# Altium PCB DogBLDC.PcbDoc
Units mm, origin at the board's own origin, x right, y up, seen from the top; angles counter-clockwise.
Board outline 40 x 50 mm, 4 copper layers (Top Layer, Signal Layer 5, Signal Layer 8, Bottom Layer), stack 1.49 mm thick; 102 components, 90 nets, 395 pads, 72 vias.
Unrouted connection lines stored in the file: 234.
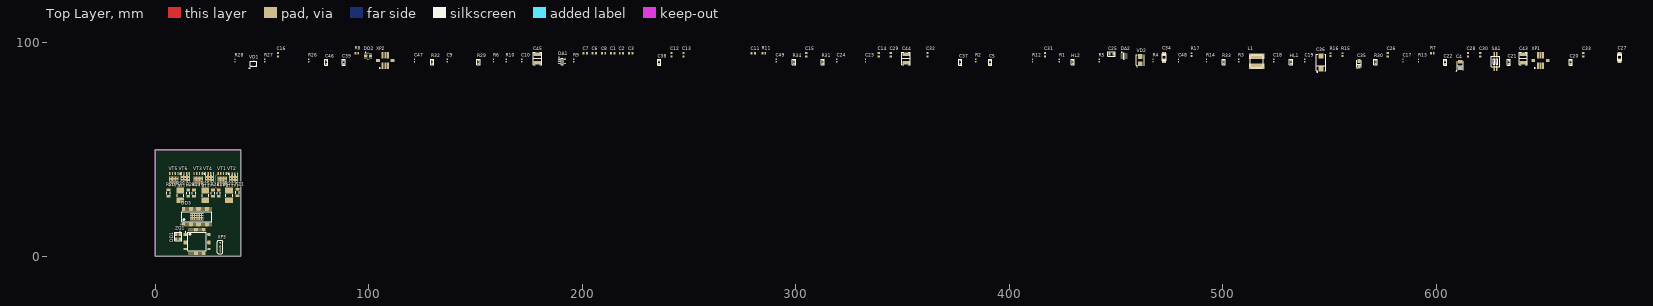
[diagram p0: Top Layer view]
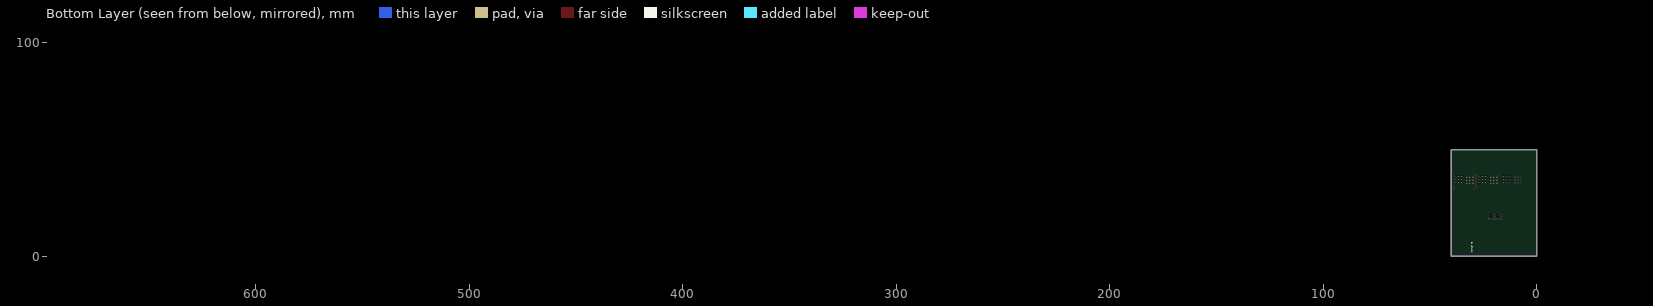
[diagram p1: Bottom Layer view, seen from below]
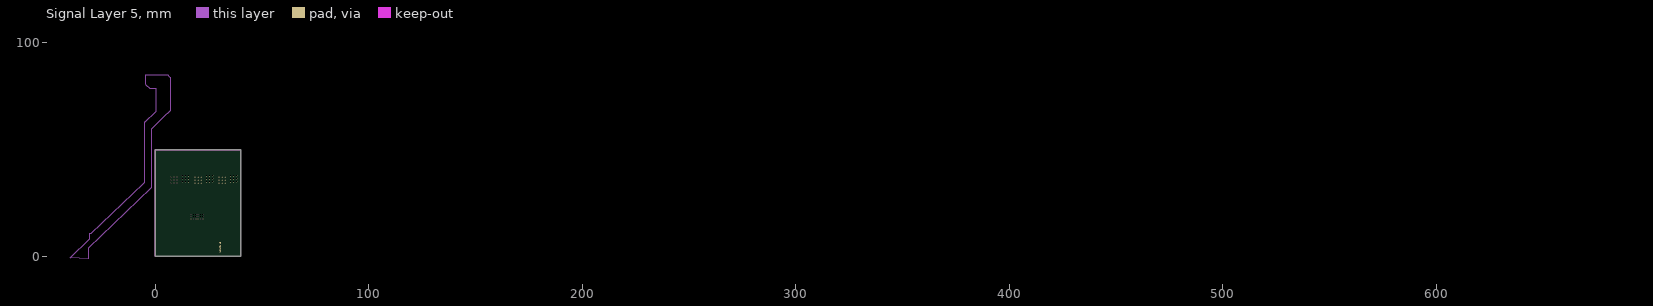
[diagram p2: Signal Layer 5]

## Layer stack, top to bottom
Top Solder: solder mask 0.0102, Solder Resist, Dk 3.5
Top Layer: signal copper 0.035
Dielectric 2: prepreg 0.32, Dk 4.2
Signal Layer 5: signal copper 0.035
Dielectric 4: core 0.71, Dk 4.2
Signal Layer 8: signal copper 0.035
Dielectric 9: prepreg 0.32, Dk 4.2
Bottom Layer: signal copper 0.035
Bottom Solder: solder mask 0.1016, Solder Resist, Dk 3.5

## Board outline
0,0 40,0 40,50 0,50

## Design rules (kind name [scope] priority, off if disabled: settings)
Clearance DIGITAL_SIGNAL [All] p1: gap=0.2
ComponentClearance [All] p1 off: gap=0.254 collisioncheckmode=3 verticalgap=0.254 showdistances=FALSE
DiffPairsRouting DiffPair_DiffPairsRouting [InDifferentialPair ('NewDifferentialPair1')] p1 off: maxlimit=0.254 minlimit=0.254 mostfreqgap=0.254 toplayer_minwidth=0.381 toplayer_maxwidth=0.381 toplayer_prefwidth=0.381 midlayer1_minwidth=0.381 midlayer1_maxwidth=0.381 midlayer1_prefwidth=0.381 midlayer2_minwidth=0.381 midlayer2_maxwidth=0.381 midlayer2_prefwidth=0.381 bottomlayer_minwidth=0.381 bottomlayer_maxwidth=0.381 bottomlayer_prefwidth=0.381 maxuncoupledlength=12.7
DiffPairsRouting [All] p2: maxlimit=0.254 minlimit=0.2 mostfreqgap=0.2 toplayer_minwidth=0.2 toplayer_maxwidth=0.381 toplayer_prefwidth=0.2 midlayer1_minwidth=0.2 midlayer1_maxwidth=0.381 midlayer1_prefwidth=0.2 midlayer2_minwidth=0.2 midlayer2_maxwidth=0.381 midlayer2_prefwidth=0.2 bottomlayer_minwidth=0.2 bottomlayer_maxwidth=0.381 bottomlayer_prefwidth=0.2 maxuncoupledlength=12.7
Height [All] p1 off: minheight=0 maxheight=25.4 prefheight=12.7
MatchedLengths DiffPair_MatchedLengths [InNetClass('DIFF')] p1: tolerance=0.5 checknetsindiffpair=TRUE checkdiffpairvsdiffpair=FALSE checkothers=FALSE
PlaneClearance PlaneClearance_1 [InNetClass('Signal')] p1 off: clearance=35
PlaneClearance [InNetClass('POWER')] p2: clearance=0.7
PlaneConnect [All] p1: planeconnectstyle=Relief reliefexpansion=0.508 reliefentries=4 reliefconductorwidth=0.35 reliefairgap=0.254
PolygonConnect [All] p1: connectstyle=Relief reliefconductorwidth=0.3 reliefentries=4 polygonreliefangle="90 Angle" airgapwidth=0.22
RoutingVias [All] p1: holewidth=0.4 width=0.7 viastyle="Through Hole" minholewidth=0.4 minwidth=0.7 maxholewidth=0.711 maxwidth=1.27
SolderMaskExpansion [All] p1: expansion=0.102
Width Width_SignalPower [All] p1: maxlimit=2 minlimit=0.2 preferedwidth=0.22 checkconnectedcopper=TRUE
24 further rules are at their usual default settings.

## Classes and differential pairs
differential pair I_U_1: +"" -""
differential pair I_V_1: +"" -""
differential pair I_W_1: +I_W_1_P -I_W_1_N
differential pair I_U_2: +"" -""
differential pair CAN: +CAN_P -CAN_N
differential pair I_V_2: +"" -""

## Components (designator, comment, footprint, x,y, rotation, side; value= is the part's Value field where it differs from the comment)
C1 "Capacitor" 0603cap 214.299,95.149 r0 top
C2 "Capacitor" 0603cap 218.399,95.149 r0 top
C3 "Capacitor" 0603cap 222.799,95.149 r0 top
C4 "1uF" "TC_B (3528)" 611.298,89.65 r90 top
C5 "Capacitor" 0603c 391.199,90.85 r90 top
C6 "Capacitor" 0603cap 205.699,95.149 r0 top
C7 "Capacitor" 0603cap 201.399,95.149 r0 top
C8 "Capacitor" 0603cap 209.999,95.149 r0 top
C9 "C_1" "RES 0402" 136.799,91.749 r90 top
C10 "C_1" "RES 0402" 171.699,91.749 r90 top
C11 "Capacitor" 0603cap 280.099,95.149 r0 top
C12 "Capacitor" 0603cap 241.799,94.449 r90 top
C13 "Capacitor" 0603cap 247.399,94.449 r90 top
C14 "Capacitor" 0603cap 338.899,94.449 r90 top
C15 "Capacitor" 0603cap 304.899,94.449 r90 top
C16 "Capacitor" 0603cap 57.5,94.449 r90 top
C17 "C_1" "RES 0402" 584.498,91.749 r90 top
C18 "C_1" "RES 0402" 523.899,91.749 r90 top
C19 "C_1" "RES 0402" 538.499,91.749 r90 top
C20 "C_1" 0603c 663.098,90.85 r90 top
C21 "C_1" 0603c 634.098,90.85 r90 top
C22 "C_1" 0603c 604.198,90.85 r90 top
C23 "C_1" "RES 0402" 332.699,91.749 r90 top
C24 "C_1" "RES 0402" 319.299,91.749 r90 top
C25 "C_1" 0805 447.999,94.749 r0 top
C26 "C_1" 0603cap 577.299,94.449 r90 top
C27 "C_1" "1206 - duplicate" 685.898,91.649 r90 top
C28 "C_1" 0603cap 614.898,94.449 r90 top
C29 "C_1" 0603cap 344.499,94.449 r90 top
C30 "C_1" 0603cap 620.698,94.449 r90 top
C31 "C_1" 0603cap 416.799,94.449 r90 top
C32 "C_1" 0603cap 361.699,94.449 r90 top
C33 "C_1" 0603cap 668.898,94.449 r90 top
C34 "C_1" "1206 - duplicate" 472.499,91.649 r90 top
C35 "1uF" "TC_A (3216)" 563.899,90.25 r90 top
C36 "1uF" "TC_D (7343)" 546.099,90.85 r90 top
C37 "0.1 мк" 0603C 377.199,90.85 r90 top
C38 "0.1 мк" 0603C 235.999,90.85 r90 top
C39 "Capacitor" 0603C 88.199,90.85 r90 top
C43 "10 мк" 1812С 640.798,92.749 r90 top
C44 "10 мк" 1812С 351.699,92.749 r90 top
C45 "10 мк" 1812С 178.999,92.749 r90 top
C46 "0.1 мк" 0603C 80.199,90.85 r90 top
C47 "Capacitor" "RES 0402" 121.399,91.749 r90 top
C48 "Capacitor" "RES 0402" 479.299,91.749 r90 top
C49 "Capacitor" "RES 0402" 290.899,91.749 r90 top
DA1 "TLV2781" SOT23-5 190.599,91.349 r0 top
DA2 "TPS7B9xx" SOT23_6_Pin 453.799,93.849 r0 top
DD1 "STM32G431x6" STM-LQFP64_L 19.6,7 r0 top
DD2 "TCAN337DCN" SOT23-8 99.699,93.849 r0 top
DD3 "DRV8310" TSSOP50P810X120_HS-57N 19.5,18.6 r90 top
HL1 "Value" 0603D 531.999,91.05 r90 top
HL2 "Value" 0603D 429.799,91.05 r90 top
L1 "DR74-330-R" "Inductor 6.3x6.3" 515.999,91.449 r0 top
R1 "Resistor" "RES 0402" 423.499,91.749 r90 top
R2 "Resistor" "RES 0402" 384.299,91.749 r90 top
R3 "Resistor" "RES 0402" 507.499,91.749 r90 top
R4 "Resistor" "RES 0402" 467.399,91.749 r90 top
R5 "Resistor" "RES 0402" 442.199,91.749 r90 top
R6 "Resistor" "RES 0402" 158.399,91.749 r90 top
R7 "Resistor" 0603res 598.298,95.149 r0 top
R8 "Resistor" 0603res 94.499,95.149 r0 top
R9 "Resistor" "RES 0402" 195.999,91.749 r90 top
R10 "Resistor" "RES 0402" 164.399,91.749 r90 top
R11 "Resistor" 0603res 285.099,95.149 r0 top
R12 "Resistor" "RES 0402" 410.899,91.749 r90 top
R13 "Resistor" "RES 0402" 591.798,91.749 r90 top
R14 "Resistor" "RES 0402" 492.399,91.749 r90 top
R15 "Resistor" 0603RES 556.199,94.549 r90 top
R16 "Resistor" 0603RES 550.599,94.549 r90 top
R17 "Resistor" 0603res 485.499,94.549 r90 top
R18 "Resistor" 1206R 29.75,29.6 r90 top
R19 "Resistor" 1206R 18.2,29.6 r90 top
R20 "Resistor" 1206R 6.25,29.7 r90 top
R21 "Resistor" 1206R 38.56,29.9 r90 top
R22 "Resistor" 1206R 27.05,29.6 r90 top
R23 "Resistor" 1206R 15.45,29.6 r90 top
R24 "Resistor" RES_LR2512 34.55,28.6 r90 top
R25 "Resistor" RES_LR2512 23.45,28.6 r90 top
R26 "Resistor" "RES 0402" 71.9,91.749 r90 top
R27 "Resistor" "RES 0402" 51.3,91.749 r90 top
R28 "Resistor" "RES 0402" 37.4,91.749 r90 top
R29 "Resistor" 0603R 151.399,91.05 r90 top
R30 "Resistor" 0603R 571.599,91.05 r90 top
R31 "Resistor" 0603R 312.699,91.05 r90 top
R32 "Resistor" 0603R 129.799,91.05 r90 top
R33 "Resistor" 0603R 500.499,91.05 r90 top
R34 "Resistor" 0603R 299.199,91.05 r90 top
R35 "Resistor" RES_LR2512 11.7,28.6 r90 top
SA1 "DIP переключатель 2" SW-2 627.198,88.15 r0 top
VD1 "SM712" SOT23_true 45.1,89.05 r90 top
VD2 "Diod" SMB 461.499,91.949 r90 top
VT1 "MOSFET GOST_PQFN5X6" "Power 5x6-8" 33.25,38.8 r180 top
VT2 "MOSFET GOST_PQFN5X6" "Power 5x6-8" 34.75,33.3 r0 top
VT3 "MOSFET GOST_PQFN5X6" "Power 5x6-8" 22,38.81 r180 top
VT4 "MOSFET GOST_PQFN5X6" "Power 5x6-8" 23.5,33.31 r0 top
VT5 "MOSFET GOST_PQFN5X6" "Power 5x6-8" 10.65,38.78 r180 top
VT6 "MOSFET GOST_PQFN5X6" "Power 5x6-8" 12.15,33.31 r0 top
XP1 "Конт.6_Вилка_ отд.контакты" G125-MS10605L3P 648.898,91.749 r0 top
XP2 "Конт.6_Вилка_ отд.контакты" G125-MS10605L3P 107.799,91.749 r0 top
XP3 "Конт.4_Single" PLL4 30.3,6.2 r0 top
ZQ1 "KX-7" kx-7 11.632,10.4 r270 top

## Footprints (in the part's own frame and the unit in brackets; to place one, negate y for a bottom-side part, rotate by r counter-clockwise, add the part's x,y. Pads: shape width x height; smd on the part's side, far side on the other; paste and mask are expansions set on the pad)
0603c [mm] "Chip Resistor, 2-Leads, Body 1,40x0,80mm, IPC Medium Density"
  rect 0.9x1.05 smd: 1(-0.8,0) 2(0.8,0)
  silkscreen extent -1.4,-0.7 1.4,0.7, body extent -0.85,-0.45 0.85,0.45, height 0.9
0603C [mm] "Chip Resistor, 2-Leads, Body 1,40x0,80mm, IPC Medium Density"
  rect 0.9x1.05 smd: 1(-0.8,0) 2(0.8,0)
  silkscreen extent -1.4,-0.7 1.4,0.7, body extent -0.85,-0.45 0.85,0.45, height 0.9
0603cap [mm] "Chip Resistor, 2-Leads, Body 1,40x0,80mm, IPC Medium Density"
  rect 0.9x1.05 smd: 1(-0.8,0) 2(0.8,0)
  body extent -0.93,-0.41 0.93,0.41, height 0.81
0603D [mm] "Chip Resistor, 2-Leads, Body 1.60x0.85mm, IPC Medium Density"
  rect 0.8x0.95 smd: 1(-0.65,0) 2(0.65,0)
  silkscreen extent -1.3,-0.75 1.3,0.75, body extent -1,-0.6 1,0.6, height 1.1
0603R [mm] "Chip Resistor, 2-Leads, Body 1.60x0.85mm, IPC Medium Density"
  rect 0.8x0.95 smd: 1(-0.65,0) 2(0.65,0)
  silkscreen extent -1.3,-0.75 1.3,0.75, body extent -0.87,-0.47 0.88,0.48, height 0.9
0603res [mm] "Chip Resistor, 2-Leads, Body 1.60x0.85mm, IPC Medium Density"
  rect 0.8x0.95 smd: 1(-0.65,0) 2(0.65,0)
  body extent -0.85,-0.4 0.85,0.4, height 0.56
0603RES [mm] "Chip Resistor, 2-Leads, Body 1.60x0.85mm, IPC Medium Density"
  rect 0.8x0.95 smd: 1(-0.65,0) 2(0.65,0)
  body extent -0.85,-0.4 0.85,0.4, height 0.56
0805 [mm] "Chip Capacitor, 2-Leads, Body 2,0x1,3mm, IPC Medium Density"
  rect 1x1.4 smd: 1(-1,0) 2(1,0)
  silkscreen extent -1.8,-1.02 1.8,1.02, body extent -1,-0.6 1,0.6, height 1
"1206 - duplicate" [mil]
  rect 80x80 smd: 1(0,0) 2(125,0)
  silkscreen extent 0,-30 125,30, body extent 0,-30 125,30, height 39
1206R [mm]
  rect 1.2x1.8 smd: 1(-1.5,0) 2(1.5,0)
  silkscreen extent -0.5,-0.8 0.5,0.8, body extent -1.55,-0.77 1.55,0.78, height 0.55
1812С [mm]
  rect 1.6x3.5 smd: 1(-1.95,0) 2(1.95,0)
  silkscreen extent -2.95,-1.95 2.95,1.95, body extent -2.25,-1.6 2.25,1.6, height 1.75
G125-MS10605L3P [mm]
  rect 1.85x1.5 smd: 0(-3.4,0) 0(3.4,0)
  rect 0.95x3 smd: 1(-1.25,-2.5) 2(-1.25,2.5) 3(0,-2.5) 4(0,2.5) 5(1.25,-2.5) 6(1.25,2.5)
  silkscreen extent -2.82,-3.72 -2.38,-3.28, body extent -3.94,-2.9 3.94,2.9, height 6.9
"Inductor 6.3x6.3" [mm]
  rect 7.3x2.6 smd: 1(0,2.35) 2(0,-2.35)
  silkscreen extent -3,-3 3,3, body extent -4.53,-4.63 4.53,4.43, height 3
kx-7 [mm]
  rect 1.5x1.3 smd: 1(0,-1.8) 2(2.3,-1.8) 3(2.3,0) 4(0,0)
  silkscreen extent -1.3,-2.5 3.1,0.7, body extent -0.45,-2.2 2.75,0.3, height 0.6
PLL4 [mm]
  rect 1x1 hole 0.65 paste+0: 1(0,0)
  round 1 hole 0.65 paste+0: 2(0,-1.27) 3(0,-2.54) 4(0,-3.81)
  silkscreen extent -1.25,-5.04 1.25,1.27, body extent -1.27,-5.04 1.27,1.27, height 8.44
"Power 5x6-8" [mm]
  rect 0.61x1.27 smd: D(0,5.47) D(1.27,5.47) D(2.54,5.47) D(3.81,5.47) G(3.81,0) S(0,0) S(1.27,0) S(2.54,0)
  rect 4.42x3.65 smd: D(1.9,3.1)
  silkscreen extent -1.25,-0.25 -0.75,0.25, body extent -0.6,-0.2 4.4,5.8, height 0.9
"RES 0402" [mm] "Chip Resistor, 2-Leads, Body 1.00x0.50mm, IPC Medium Density"
  rect 0.8x0.6 smd: 1(-0.575,0) 2(0.575,0)
  body extent -0.55,-0.28 0.55,0.27, height 0.35
RES_LR2512 [mm] "Chip Resistor, 2-Leads, Body 6.25x3.30mm, IPC Medium Density"
  rect 2.65x3.55 smd: 1(-2.275,0) 2(2.275,0)
  silkscreen extent -0.55,-1.68 0.55,1.68, body extent -3.25,-1.78 3.25,1.78, height 1.1
SMB [mm] "Diod"
  rect 2.25x2.1 smd: 1(1.725,0) 2(-1.725,0)
  silkscreen extent -3.17,-1.9 2.4,1.9, body extent -2.57,-1.9 2.57,1.9, height 2.4
SOT23-5 [mm] "SOT23-5, max999"
  rect 1x0.6 smd: 1(-1.375,0.95) 2(-1.375,0) 3(-1.375,-0.95) 4(1.375,-0.95) 5(1.375,0.95)
  silkscreen extent -1.5,-1.5 0.5,1.92, body extent -0.88,-1.5 0.87,1.5, height 1.45
SOT23-8 [mm] "TSOP, 8-Leads, Body 2.90x1.60mm, Pitch 0.65mm, IPC Medium Density"
  oval 1.55x0.45 smd: 1(-1.125,0.975) 2(-1.125,0.325) 3(-1.125,-0.325) 4(-1.125,-0.975) 5(1.125,-0.975) 6(1.125,-0.325) 7(1.125,0.325) 8(1.125,0.975)
  silkscreen extent -1.25,-1.5 0.05,1.87, body extent -0.9,-1.5 0.9,1.5, height 1.45
SOT23_6_Pin [mm] "SOT23, 6-Leads, Body 2.90x2.45mm, Pitch 0.95mm, IPC Medium Density"
  rect 1.05x0.55 smd: 1(-1.025,0.95) 2(-1.025,0) 3(-1.025,-0.95) 4(1.025,-0.95) 5(1.025,0) 6(1.025,0.95)
  silkscreen extent -1.15,-1.5 0.1,1.9, body extent -0.7,-1.5 0.7,1.5, height 1.1
SOT23_true [mil]
  rect 30x30 smd: 1(0,0) 2(0,-75) 3(90,-37.5)
  silkscreen extent -50,-98 94,50, body extent -4,-97 94,21, height 41
STM-LQFP64_L [mm] "Thin QFP, 64-Leads, Body 10x10mm, Pitch 0.5mm, IPC High Density"
  oval 1.55x0.25 smd: 1(-5.525,3.75) 2(-5.525,3.25) 3(-5.525,2.75) 4(-5.525,2.25) 5(-5.525,1.75) 6(-5.525,1.25) 7(-5.525,0.75) 8(-5.525,0.25) 9(-5.525,-0.25) 10(-5.525,-0.75) 11(-5.525,-1.25) 12(-5.525,-1.75) 13(-5.525,-2.25) 14(-5.525,-2.75) 15(-5.525,-3.25) 16(-5.525,-3.75) 33(5.525,-3.75) 34(5.525,-3.25) 35(5.525,-2.75) 36(5.525,-2.25) 37(5.525,-1.75) 38(5.525,-1.25) 39(5.525,-0.75) 40(5.525,-0.25) 41(5.525,0.25) 42(5.525,0.75) 43(5.525,1.25) 44(5.525,1.75) 45(5.525,2.25) 46(5.525,2.75) 47(5.525,3.25) 48(5.525,3.75)
  oval 0.25x1.55 smd: 17(-3.75,-5.525) 18(-3.25,-5.525) 19(-2.75,-5.525) 20(-2.25,-5.525) 21(-1.75,-5.525) 22(-1.25,-5.525) 23(-0.75,-5.525) 24(-0.25,-5.525) 25(0.25,-5.525) 26(0.75,-5.525) 27(1.25,-5.525) 28(1.75,-5.525) 29(2.25,-5.525) 30(2.75,-5.525) 31(3.25,-5.525) 32(3.75,-5.525) 49(3.75,5.525) 50(3.25,5.525) 51(2.75,5.525) 52(2.25,5.525) 53(1.75,5.525) 54(1.25,5.525) 55(0.75,5.525) 56(0.25,5.525) 57(-0.25,5.525) 58(-0.75,5.525) 59(-1.25,5.525) 60(-1.75,5.525) 61(-2.25,5.525) 62(-2.75,5.525) 63(-3.25,5.525) 64(-3.75,5.525)
  silkscreen extent -5.65,-4.35 4.35,4.55, body extent -5,-5 5,5, height 1.6
SW-2 [mil]
  rect 30x100 smd: 1(0,0) 2(50,0) 3(50,250) 4(0,250)
  silkscreen extent -50,25 100,225
"TC_A (3216)" [mm] "Tantalum capacitor, type A,  1 pin - plus"
  rect 1.75x1.25 smd: 1(-1.325,0) 2(1.325,0)
  silkscreen extent -2.15,-0.97 1.7,1, body extent -1.73,-0.8 1.73,0.8, height 1.64
"TC_B (3528)" [mm] "Tantalum capacitor, type B, 1 pin - plus"
  rect 1.75x2.25 smd: 1(-1.475,0) 2(1.475,0)
  silkscreen extent -2.82,-1.5 1.85,1.92, body extent -1.85,-1.5 1.85,1.5, height 2.1
"TC_D (7343)" [mm] "Tantalum capacitor, type D, 1 pin - plus"
  rect 2.55x2.45 smd: 1(-3.025,0) 2(3.025,0)
  silkscreen extent -4.57,-2.3 3.8,2.3, body extent -3.75,-2.25 3.75,2.25, height 3.1
TSSOP50P810X120_HS-57N [mm] "TSSOP, 56-Leads, Body 14.00x6.10mm, Pitch 0.50mm, Thermal Pad 6.35.2x3.61.2mm, IPC Medium Density"
  oval 1.75x0.3 smd: 1(-3.625,6.75) 2(-3.625,6.25) 3(-3.625,5.75) 4(-3.625,5.25) 5(-3.625,4.75) 6(-3.625,4.25) 7(-3.625,3.75) 8(-3.625,3.25) 9(-3.625,2.75) 10(-3.625,2.25) 11(-3.625,1.75) 12(-3.625,1.25) 13(-3.625,0.75) 14(-3.625,0.25) 15(-3.625,-0.25) 16(-3.625,-0.75) 17(-3.625,-1.25) 18(-3.625,-1.75) 19(-3.625,-2.25) 20(-3.625,-2.75) 21(-3.625,-3.25) 22(-3.625,-3.75) 23(-3.625,-4.25) 24(-3.625,-4.75) 25(-3.625,-5.25) 26(-3.625,-5.75) 27(-3.625,-6.25) 28(-3.625,-6.75) 29(3.625,-6.75) 30(3.625,-6.25) 31(3.625,-5.75) 32(3.625,-5.25) 33(3.625,-4.75) 34(3.625,-4.25) 35(3.625,-3.75) 36(3.625,-3.25) 37(3.625,-2.75) 38(3.625,-2.25) 39(3.625,-1.75) 40(3.625,-1.25) 41(3.625,-0.75) 42(3.625,-0.25) 43(3.625,0.25) 44(3.625,0.75) 45(3.625,1.25) 46(3.625,1.75) 47(3.625,2.25) 48(3.625,2.75) 49(3.625,3.25) 50(3.625,3.75) 51(3.625,4.25) 52(3.625,4.75) 53(3.625,5.25) 54(3.625,5.75) 55(3.625,6.25) 56(3.625,6.75)
  rect 3.61x6.35 smd: 57(0,0)
  silkscreen extent -3.75,-7.05 2.35,7.57, body extent -3.1,-7.05 3.1,7.05, height 1.2

## Part data
C4 C35 C36: library part Capacitor_pol
C37 C38 C43 C44 C45 C46: library part C
DD1: "ARM Cortex-M4 32-bit MCU+FPU, 210 DMIPS, 512 kB Flash, 192 kB Internal RAM, 82 I/Os, 100-pin LQFP, -40 to 85 degC, Tray"
DD3: library part DRV8301
HL1 HL2: library part LED
L1: library part Inductance
XP3: library part Конт.4_Single_1
ZQ1: library part XTAL_4(KX-7)

## Via types
v1: diameter 0.6, hole 0.3, Top Layer to Bottom Layer, 54 vias
v2: diameter 0.5, hole 0.2, Top Layer to Bottom Layer, 18 vias

## Nets (pads, with @x,y where several pads share a name; then routed paths per layer and width w, separated by ;. In a path a pad name is that pad's centre, name@x,y a point inside that pad or via, vN(x,y) a via of type N, cw(c..) or ccw(c..) an arc to the next point about the centre after c; other vN are vias at no path point)
1V65: C9.1 DA1.4 R6.2 R26.2
3V: C1.2 C2.2 C3.2 C6.2 C7.2 C8.2 C10.2 C12.2 C13.2 C16.2 C36.1 DA1.5 DA2.5 DD1.1 DD1.16 DD1.28 DD1.29 DD1.32 DD1.48 DD1.64 DD2.3 R9.2 R11.1 R17.2 XP3.1
3V3_MCU: DD3.24 DD3.49
15V: C4.1 C27.1 C28.2 C30.2 C33.1 C43.1 C44.1 C45.1 DD3.29 DD3.53 DD3.54 R1.1 VT1.D VT3.D VT5.D XP1.1 XP1.2
  other v1: 7.25,34.28 8.75,34.28 10.15,34.28 18.6,34.31 20.1,34.31 21.5,34.31 29.85,34.3 31.35,34.3 32.75,34.3 7.25,35.68 8.75,35.68 10.15,35.68 29.85,35.7 31.35,35.7 32.75,35.7 18.6,35.71 20.1,35.71 21.5,35.71 7.25,37.08 8.75,37.08 10.15,37.08 29.85,37.1 31.35,37.1 32.75,37.1 18.6,37.11 20.1,37.11 21.5,37.11
CAN_N: DD2.6 R8.1 VD1.2 XP1.5
CAN_P: DD2.7 R8.2 VD1.1 XP2.1
CAN_RX: DD1.45 DD2.4
CAN_SILENT: DD1.4 DD2.8
CAN_TX: DD1.46 DD2.1
DIP_1: DD1.2 SA1.4
DIP_2: DD1.3 SA1.3
EN1: DD1.56
FAULT_1: DD3.6
GH1_A: DD3.47 R18.1
GH1_B: DD3.42 R19.1
GH1_C: DD3.37 R20.1
GL1_A: DD3.45 R21.1
GL1_B: DD3.40 R22.1
GL1_C: DD3.35 R23.1
GND: C1.1 C2.1 C3.1 C4.2 C5.1 C6.1 C7.1 C8.1 C9.2 C10.1 C11.1 C12.1 C13.1 C14.2 C15.1 C16.1 C17.2 C18.2 C19.2 C20.1 C21.1 C22.1 C23.2 C24.1 C27.2 C28.1 C30.1 C33.2 C34.1 C35.2 C36.2 C37.2 C38.2 C39.1 C43.2 C44.2 C45.2 C46.2 C47.2 C48.2 C49.2 DA1.2 DA2.3 DA2.4 DD1.27 DD1.31 DD1.47 DD1.63 DD2.2 DD3.28 DD3.31 DD3.33 DD3.57 HL1.2 HL2.2 R2.2 R10.1 R12.1 R14.1 R15.2 R24.1 R25.1 R28.2 R32.2 R33.2 R34.2 R35.1 SA1.1 SA1.2 VD1.3 VD2.1 XP1.3 XP1.4 XP3.4 ZQ1.1 ZQ1.3
  other v2: 16.75,17.5 17.85,17.5 18.95,17.5 20.05,17.5 21.15,17.5 22.25,17.5 16.75,18.6 17.85,18.6 18.95,18.6 20.05,18.6 21.15,18.6 22.25,18.6 16.75,19.7 17.85,19.7 18.95,19.7 20.05,19.7 21.15,19.7 22.25,19.7
I_U_1: C23.1 DD3.25
I_V_1: C24.2 DD3.26
I_W_1_N: DD1.26 R28.1
I_W_1_P: C39.2 DD1.24 R26.1 R27.1
NetC11_2: C11.2 DD1.14 R11.2
NetC14_1: C14.1 DD1.5 ZQ1.4
NetC15_2: C15.2 DD1.6 ZQ1.2
NetC17_1: C17.1 DD3.2 R13.2
NetC18_1: C18.1 DD3.56
NetC19_1: C19.1 R13.1
NetC20_2: C20.2 DD3.13
NetC21_2: C21.2 DD3.23
NetC22_2: C22.2 DD3.27
NetC25_1: C25.1 DD3.15
NetC25_2: C25.2 DD3.14
NetC26_1: C26.1 DD3.50 DD3.51 L1.1 VD2.2
NetC26_2: C26.2 DD3.52
NetC29_2: C29.2 DD3.38
NetC31_2: C31.2 DD3.48
NetC32_2: C32.2 DD3.43
NetC34_2: C34.2 C35.1 DA2.1 L1.2 R16.1
NetDA1_1: DA1.1 R6.1
NetDA1_3: DA1.3 R9.1 R10.2
NetDD3_1: DD3.1 R14.2
NetDD3_3: DD3.3 R15.1 R16.2
NetDD3_7: DD3.7 R12.2
NetHL1_1: HL1.1 R7.1
NetHL2_1: HL2.1 R17.1
NetR3_1: R3.1
NetR4_1: R4.1
NetR5_1: R5.1
NetR18_2: R18.2 VT1.G | length 8.9
  Top Layer w0.2: VT1.G 28.45,37.81 28.45,32.05 29.4,31.1 R18.2
NetR19_2: R19.2 VT3.G
NetR20_2: R20.2 VT5.G
NetR21_2: R21.2 VT2.G | length 1.9
  Top Layer w0.2: R21.2 VT2.G
NetR22_2: R22.2 VT4.G
NetR23_2: R23.2 VT6.G
NOCTW_1: DD3.5
OP1_OUT: R3.2
OP2_OUT: DD1.20 R4.2
OP3_OUT: DD1.25 R5.2
POT_1: DD1.37
POT_2: DD1.18
SH1_A: C31.1 DD3.46 R30.1 VT1.S VT2.D
  other v1: 35.25,35 36.65,35 38.15,35 35.25,36.4 36.65,36.4 38.15,36.4 35.25,37.8 36.65,37.8 38.15,37.8
SH1_B: C32.1 DD3.41 R31.1 VT3.S VT4.D
  other v1: 24,35.01 25.4,35.01 26.9,35.01 24,36.41 25.4,36.41 26.9,36.41 24,37.81 25.4,37.81 26.9,37.81
SH1_C: C29.1 DD3.36 R29.1 VT5.S VT6.D
  other v1: 12.65,35.01 14.05,35.01 15.55,35.01 12.65,36.41 14.05,36.41 15.55,36.41 12.65,37.81 14.05,37.81 15.55,37.81
SL1_A: C37.1 DD3.32 DD3.44 R24.2 VT2.S
SL1_B: C38.1 DD3.30 DD3.39 R25.2 VT4.S
SL1_C: C46.1 DD3.34 R27.2 R35.2 VT6.S
SPICLK_B: DD3.11
SPISIMO_B: DD3.9
SPISOMI_B: DD3.10
SPISTE_B: DD3.8
STBY1: DD1.57 DD3.4
SWCLK: DD1.50 XP3.2
SWDIO: DD1.49 XP3.3
TIM8_CH1: DD1.38 DD3.17
TIM8_CH1N: DD1.52
TIM8_CH2: DD1.39
TIM8_CH2N: DD1.53
TIM8_CH3: DD1.40
TIM8_CH3N: DD1.54
U1_PH_A: C48.1 R30.2 R33.1
U1_PH_B: C49.1 R31.2 R34.1
U1_PH_C: C47.1 R29.2 R32.1
U_1: DD1.8
USER_LED_1: DD1.33 R7.2
V_1: DD1.9
V_COM: C5.2 DD1.12 R1.2 R2.1
W_1: DD1.10
pads on no net: DA2.2 DA2.6 DD1.7 DD1.11 DD1.13 DD1.15 DD1.17 DD1.19 DD1.21 DD1.22 DD1.23 DD1.30 DD1.34 DD1.35 DD1.36 DD1.41 DD1.42 DD1.43 DD1.44 DD1.51 DD1.55 DD1.58 DD1.59 DD1.60 DD1.61 DD1.62 DD2.5 DD3.12 DD3.16 DD3.18 DD3.19 DD3.20 DD3.21 DD3.22 DD3.55 XP1.0 XP1.6 XP2.0 XP2.2 XP2.3 XP2.4 XP2.5 XP2.6

## Polygon pours and split planes (outlines as drawn)
no net on Signal Layer 5 "Signal Layer 1-No Net" (solid, shelved, pour order 2): -39.885,-0.669 -30.57,8.331 -30.57,10.75 -29.897,10.75 -5.471,34.35 -5.026,34.78 -5.026,63 -4.71,63 0.206,67.75 0.422,67.959 0.422,78.51 -2.336,78.51 -4.137,80.25 -4.509,80.609 -4.509,85 5.888,85 6.664,84.25 6.98,83.945 6.98,79 6.98,68.195 3.844,65.165 -1.985,59.534 -1.985,58.895 -1.985,32.119 -2.107,32 -31.346,3.75 -31.346,-1.111

## Keep-outs
Keep-Out Layer:
  the board outline again, w0.254